# Altium PCB MotorDriver_Final_V1.0.PcbDoc
Units mm, origin at the board's own origin, x right, y up, seen from the top; angles counter-clockwise.
Board outline 59.56 x 69.98 mm, 2 copper layers (Top Layer, Bottom Layer); 76 components, 46 nets, 266 pads, 113 vias.
Unrouted connection lines stored in the file: 69.
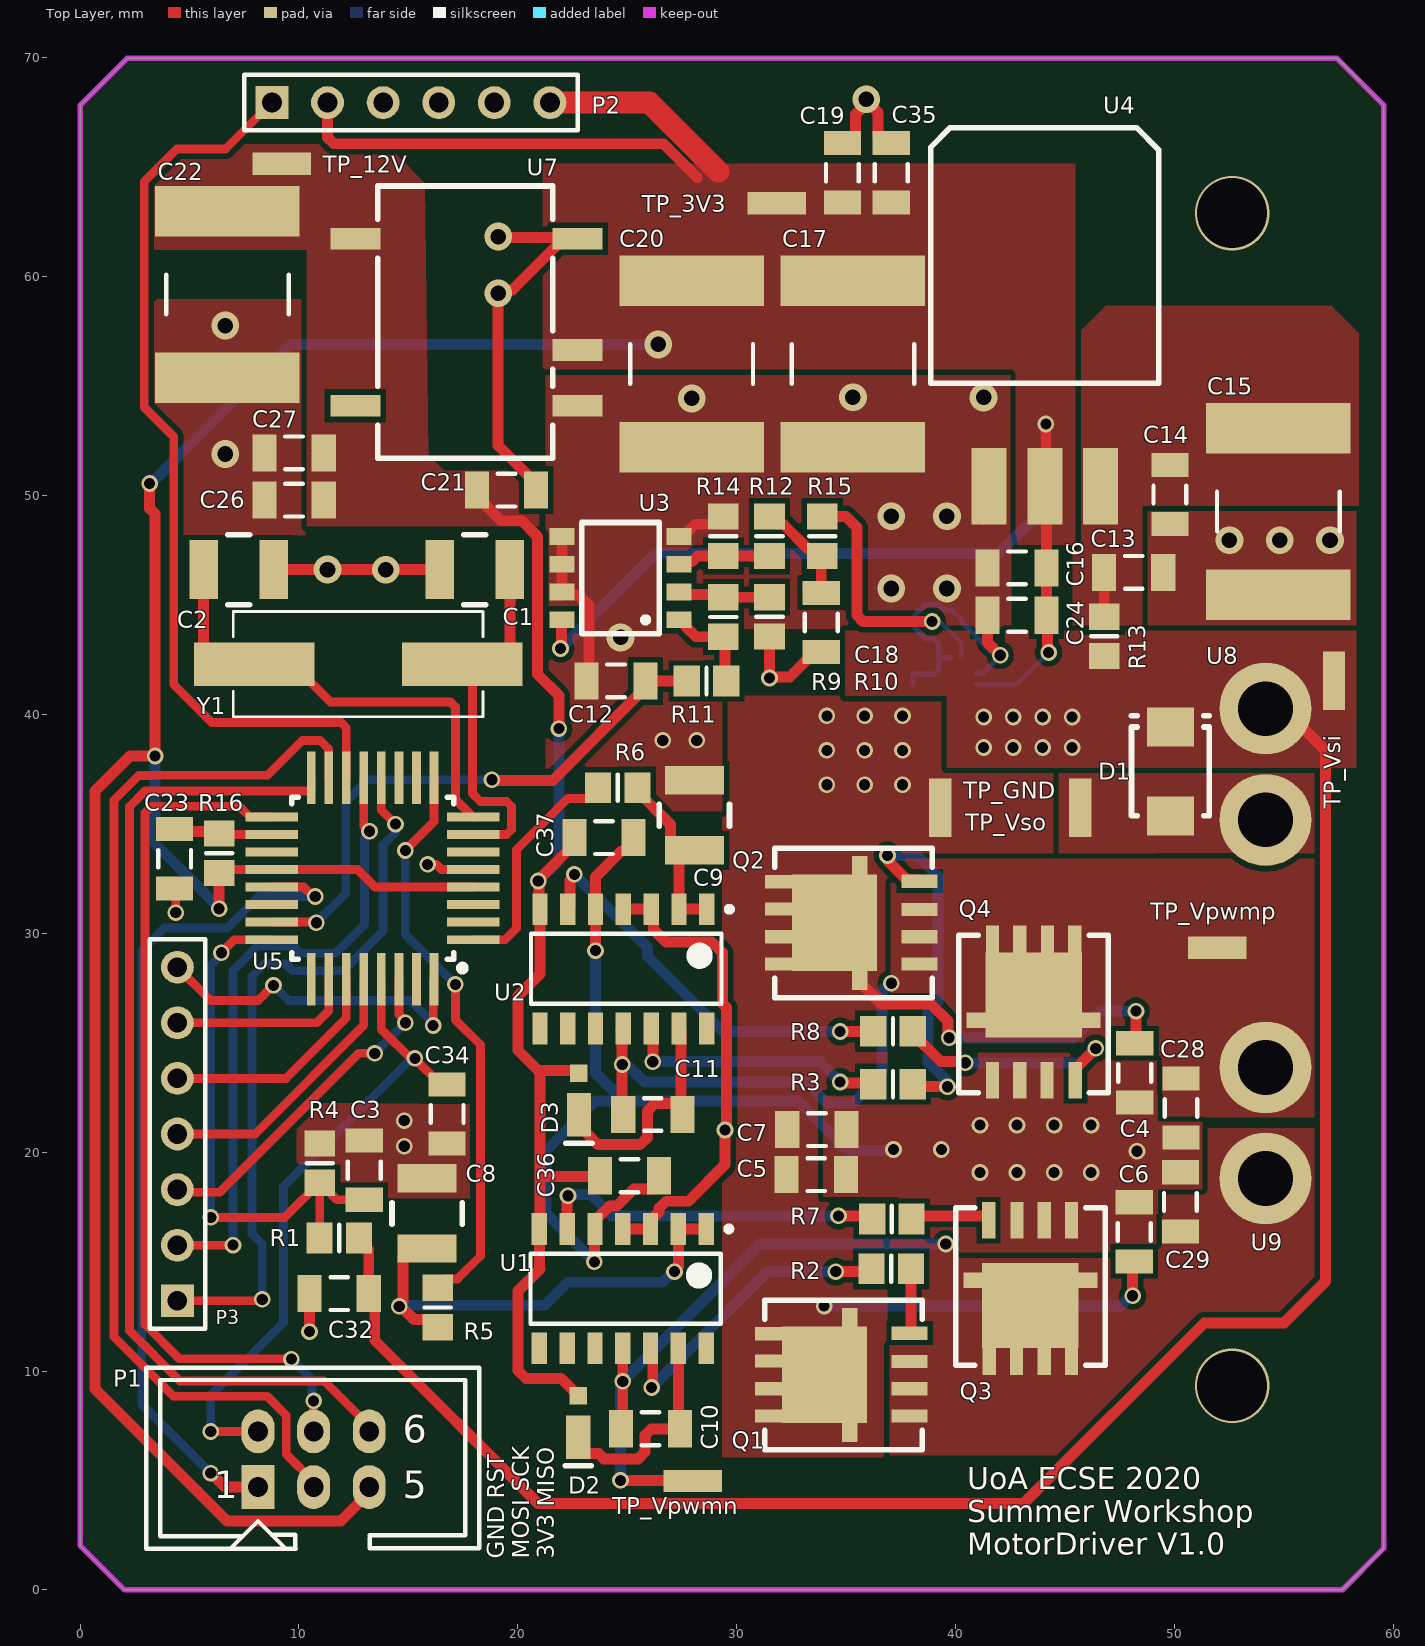
[diagram p0: Top Layer view]
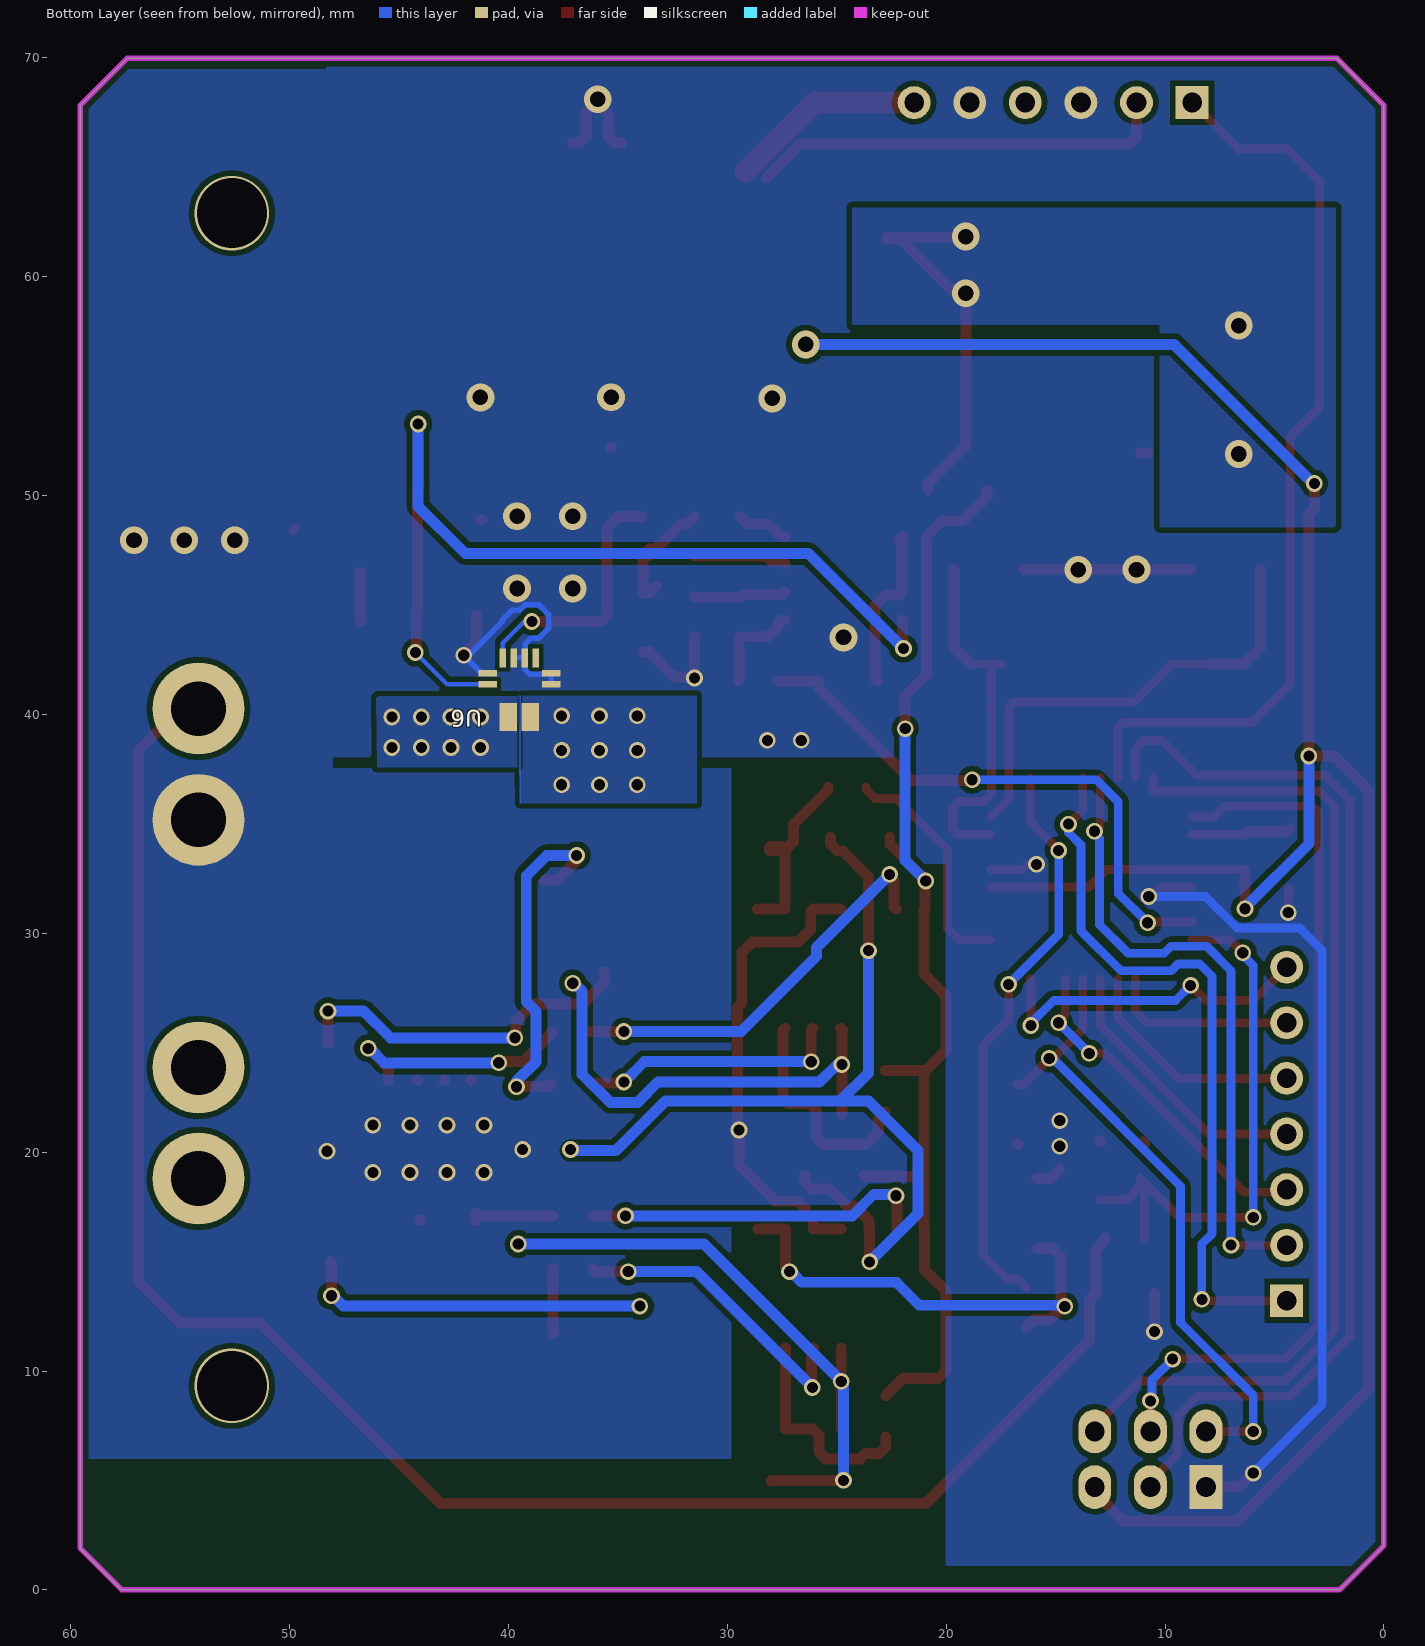
[diagram p1: Bottom Layer view, seen from below]
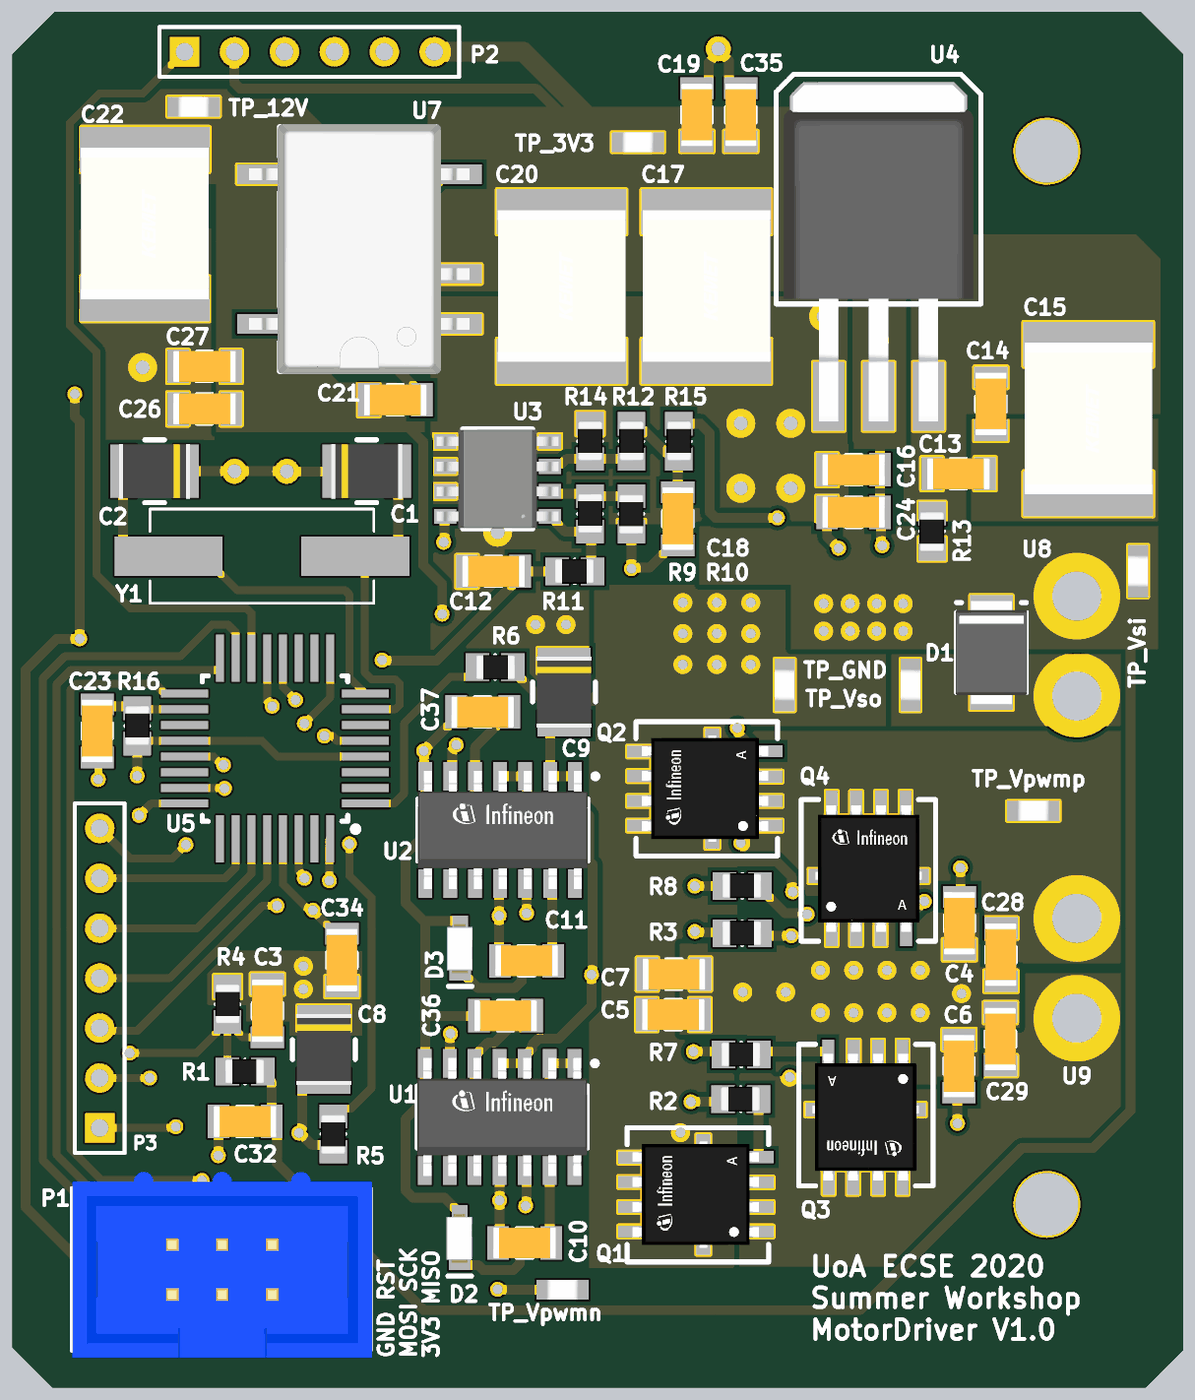
[diagram p2: 3D render of the assembled board from above, using the file's embedded part models]

## Layer stack, top to bottom
Top Solder: solder mask 0.0102, Solder Resist, Dk 3.5
Top Layer: signal copper 0.0356
Dielectric 1: dielectric 0.32, FR-4, Dk 4.8
Bottom Layer: signal copper 0.0356
Bottom Solder: solder mask 0.0102, Solder Resist, Dk 3.5

## Board outline
2.032,0 0,2.032 0,67.818 2.159,69.977 57.404,69.977 59.563,67.818 59.563,1.905 57.658,0

## Design rules (kind name [scope] priority, off if disabled: settings)
BoardOutlineClearance [All] p1: gap=0.254 ignorepadtopadclearanceinfootprint=FALSE except(0: Arc-SplitContinuation Track-SplitContinuation SMDPad-SplitContinuation THPad-SplitContinuation Via-SplitContinuation Fill-SplitContinuation Poly-SplitContinuation Region-SplitContinuation Text-SplitContinuation)
Clearance Clearance_1 [InComponent('U6')] p1: gap=0.19 ignorepadtopadclearanceinfootprint=TRUE
Clearance [All] p2: gap=0.254 ignorepadtopadclearanceinfootprint=TRUE
Height [All] p1: minheight=0 maxheight=100 prefheight=12.7
HoleSize [All] p1: absolutevalues=TRUE maxlimit=10 minlimit=0.5 maxpercent=80.000 minpercent=20.000
MinimumSolderMaskSliver [All] p1: minsoldermaskwidth=0.191
PolygonConnect [All] p1: connectstyle=Direct reliefconductorwidth=0.5 reliefentries=4 polygonreliefangle="90 Angle" airgapwidth=0.5
RoutingVias [All] p1: holewidth=0.711 width=1.27 viastyle="Through Hole" minholewidth=0.711 minwidth=1.27 maxholewidth=0.711 maxwidth=1.27
SilkToSilkClearance [All] p1: silktosilkclearance=0.1
SilkToSolderMaskClearance [IsPad] p1: minsilkscreentomaskgap=0.1 clearancetoexposedcopper=TRUE
SolderMaskExpansion [All] p1: expansion=0.102 istentingtop=FALSE
Width [All] p1: maxlimit=1 minlimit=0.2 preferedwidth=0.5
25 further rules are at their usual default settings.

## Components (designator, comment, footprint, x,y, rotation, side; value= is the part's Value field where it differs from the comment)
C1 "CER 18pF" C1210 18.034,46.609 r0 top value=?
C2 "CER 18pF" C1210 7.239,46.609 r180 top value=?
C3 "Cap CER" C1206 12.979,19.173 r270 top value=?
C4 "CER 100nF" C1206 48.184,23.622 r90 top value=100nF/100V
C5 "CER 100nF" C1206 33.655,21.031 r180 top value=100nF/100V
C6 "CER 100nF" C1206 48.158,16.358 r270 top value=100nF/100V
C7 "CER 100nF" C1206 33.63,18.974 r180 top value=100nF/100V
C8 "CER 6.8nF" C1210 15.85,17.196 r270 top value=?
C9 "CER 6.8nF" C1210 28.067,35.382 r270 top value=?
C10 "CER 220nF" C1206 26.06,7.359 r0 top value=100nF/100V
C11 "CER 220nF" C1206 26.162,21.717 r0 top value=100nF/100V
C12 "Cap CER" C1206 24.482,41.522 r0 top value=?
C13 "CER 6.8nF" C1206 48.133,46.482 r180 top value=?
C14 "CER 100nF" C1206 49.784,50.038 r90 top value=?
C15 "FILM 10uF" LDECE4150KA0N00 54.737,49.266 r90 top value=1.5uF/50V
C16 "Cap CER" C1206 42.799,46.685 r0 top value=100nF/100V
C17 "FILM 10uF" LDECE4150KA0N00 35.306,56.007 r90 top value=1.5uF/50V
C18 "Cap CER" C1206 33.858,44.196 r90 top value=?
C19 "CER 100nF" C1206 34.823,64.74 r270 top value=?
C20 "FILM 10uF" LDECE4150KA0N00 27.94,56.007 r90 top value=1.5uF/50V
C21 "CER 100nF" C1206 19.482,50.241 r180 top value=?
C22 "FILM 2.2uF" LDECE4150KA0N00 6.731,59.182 r90 top value=1.5uF/50V
C23 "Cap CER" C1206 4.318,33.401 r90 top value=?
C24 "CER 100nF" C1206 42.799,44.526 r0 top value=?
C26 "CER 100nF" C1206 9.779,49.784 r0 top value=100nF/100V
C27 "CER 100nF" C1206 9.779,51.943 r0 top value=100nF/100V
C28 "CER 100nF" C1206 50.292,22.022 r90 top value=?
C29 "CER 100nF" C1206 50.267,17.729 r270 top value=?
C32 "CER 100nF" C1206 11.836,13.538 r0 top value=?
C34 "CER 100nF" C1206 16.764,21.742 r90 top value=?
C35 "Cap CER" C1206 37.059,64.74 r90 top value=?
C36 "CER 100nF" C1206 25.095,18.923 r180 top value=100nF/100V
C37 "CER 100nF" C1206 23.927,34.366 r180 top value=100nF/100V
D1 "DO-214AA SMB" DO-214AA 49.809,37.389 r270 top
D2 "MSS1P6-M3/89A" "MicroSMP (DO-219AD)" 22.758,7.928 r90 top
D3 "MSS1P6-M3/89A" "MicroSMP (DO-219AD)" 22.784,22.66 r90 top
P1 "Header 7" HDR1X7 4.445,13.208 r90 top
P2 "Header 6" HDR1X6 8.763,67.945 r0 top
P3 "HDR3X2" HDR2X3_2P54 8.128,4.699 r0 top
Q1 "NMOS" BSC072N08NS5ATMA1_modified_v2 34.773,9.823 r90 top
Q2 "NMOS" BSC072N08NS5ATMA1_modified_v2 35.23,30.473 r90 top
Q3 "NMOS" BSC072N08NS5ATMA1_modified_v2 43.409,13.76 r180 top
Q4 "NMOS" BSC072N08NS5ATMA1_modified_v2 43.561,26.409 r0 top
R1 "RES 27k" R0805 11.836,16.078 r0 top value=?
R2 "RES 2.2" R0805 37.059,14.674 r0 top value=?
R3 "RES 2.2" R0805 37.135,23.107 r0 top value=?
R4 "RES 10k" R0805 10.947,19.496 r270 top value=?
R5 "RES 150k" R0805 16.332,12.903 r90 top value=?
R6 "RES 150k" R0805 24.562,36.652 r180 top value=?
R7 "RES 2.2" R0805 37.084,16.942 r0 top value=?
R8 "RES 2.2" R0805 37.135,25.52 r0 top value=?
R9 "Resistor 0805" R0805 29.388,44.443 r270 top value=?
R10 "Resistor 0805" R0805 31.496,44.45 r90 top value=?
R11 "Resistor 0805" R0805 28.615,41.522 r0 top value=?
R12 "Resistor 0805" R0805 31.496,48.133 r270 top value=?
R13 "RES 150k" R0805 46.787,43.561 r90 top value=?
R14 "Resistor 0805" R0805 29.388,48.133 r270 top value=?
R15 "Resistor 0805" R0805 33.909,48.133 r270 top value=?
R16 "Resistor 0805" R0805 6.35,33.655 r270 top value=?
TP_3V3 "TP_3V3" TP5015 31.826,63.348 r180 top
TP_12V "TP_12V" TP5015 9.22,65.151 r0 top
TP_GND "TP_GND" TP5015 45.695,35.738 r270 top
TP_Vpwmn "TP_Vsi" TP5015 27.991,4.978 r180 top
TP_Vpwmp "TP_Vi_amp" TP5015 51.943,29.337 r180 top
TP_Vsi "TP_Vsi" TP5015 57.277,41.529 r270 top
TP_Vso "TP_Vso" TP5015 39.294,35.738 r270 top
U1 "IRS21834SPBF" SOIC127P600X175-14N 24.79,13.767 r270 top
U2 "IRS21834SPBF" SOIC127P600X175-14N 24.816,28.372 r270 top
U3 "LT6221IS8#PBF" SOIC8_NARROW 24.689,46.221 r180 top
U4 "LD1086D2M" D2PAK-3L 44.069,59.309 r0 top
U5 "ATMega328PB" TQFP32 13.363,32.506 r180 top
U6 "ACS70331EESATR-005U3" ACS70331_12QFN 39.497,41.224 r90 bottom
U7 "ISE0312A" ISE0312A 17.907,57.912 r180 top
U8 "2 PIN HEADER 3MM" 3mm_holes 54.153,37.719 r270 top
U9 "2 PIN HEADER 3MM" 3mm_holes 54.153,21.329 r270 top
Y1 "ECS-80-18-5PX-TR" XTAL_ECS-80-18-5PX-TR 12.7,42.291 r180 top

## Footprints (in the part's own frame and the unit in brackets; to place one, negate y for a bottom-side part, rotate by r counter-clockwise, add the part's x,y. Pads: shape width x height; smd on the part's side, far side on the other; paste and mask are expansions set on the pad)
3mm_holes [mm]
  round 4.2 hole 2.5: 1(-2.54,0) 2(2.54,0)
ACS70331_12QFN [mm] "HIGH SENSITIVITY, 1 MHZ, GMR-BAS"
  rect 1.27x0.8 smd: 1(-1.35,0.5) 2(-1.35,-0.5)
  rect 0.3x0.85 smd: 5(0.15,-1.45) 6(0.65,-1.45) 11(0.65,1.45) 12(0.15,1.45)
  rect 0.85x0.3 smd: 7(1.35,-0.75) 8(1.35,-0.25) 9(1.35,0.25) 10(1.35,0.75)
  body extent -1.6,-1.5 1.4,1.5, height 0.75
BSC072N08NS5ATMA1_modified_v2 [mil]
  rect 23.94x65 smd: 1(-74,-123) 1(-25,-123) 1(24,-123) 4(75,-123) 8(-74,123) 8(-25,123) 8(25,123) 8(74,123)
  rect 65x27.87 smd: 8(-88,-15) 8(88,-15)
  rect 173.62x153.54 smd: 8(0,30.26)
  silkscreen extent -135,-146 134,138, body extent -106,-127 107,127, height 40
C1206 [mm] "Chip Capacitor, Body 3.2x1.6mm, IPC High Density"
  rect 1.1x1.7 smd: 1(-1.35,0) 2(1.35,0)
  silkscreen extent -0.4,-0.75 0.4,0.75, body extent -1.6,-0.8 1.6,0.8, height 1.5
C1210 [mm]
  rect 1.3x2.7 smd: 1(-1.6,0) 2(1.6,0)
  silkscreen extent -0.5,-1.6 0.5,1.6, body extent -1.8,-1.4 1.8,1.4, height 1.24
D2PAK-3L [mil]
  rect 63x137.8 smd: 1(100,-350) 2(0,-350) 3(-100,-350)
  silkscreen extent -205,-165 205,295, body extent -190,-400 190,279, height 200
DO-214AA [mil]
  rect 70x85 smd: 1(-80,0) 2(80,0)
  silkscreen extent -100,-70 80,70, body extent -104,-71 104,71, height 87
HDR1X6 [mm] "Connector; Header; 6 Position"
  rect 1.5x1.5 hole 0.9: 1(0,0)
  round 1.5 hole 0.9: 2(2.54,0) 3(5.08,0) 4(7.62,0) 5(10.16,0) 6(12.7,0)
  silkscreen extent -1.27,-1.27 13.97,1.27
HDR1X7 [mm] "Connector; Header; 7 Position"
  rect 1.5x1.5 hole 0.9: 1(0,0)
  round 1.5 hole 0.9: 2(2.54,0) 3(5.08,0) 4(7.62,0) 5(10.16,0) 6(12.7,0) 7(15.24,0)
  silkscreen extent -1.27,-1.27 16.51,1.27
HDR2X3_2P54 [mm] "IDC 3X2 Way 2.54 pitch"
  rect 1.5x2 hole 0.9: 1(0,0)
  oval 1.5x2 hole 0.9 paste+0: 2(0,2.54)
  oval 1.5x2 hole 0.9: 3(2.54,0) 4(2.54,2.54) 5(5.08,0) 6(5.08,2.54)
  silkscreen extent -5.1,-2.82 10.1,5.45, body extent -5.07,-3.17 10.17,6.28, height 9.1
ISE0312A [mil] "8-SMD model; 5 leads"
  rect 90x39 smd: 1(-190,150) 2(-190,50) 4(-190,-150) 5(210,-150) 8(210,150)
  silkscreen extent -145,-245 170,245, body extent -210,-250 230,250, height 285
LDECE4150KA0N00 [mm]
  rect 2.3x6.6 smd: 1(-3.8,0) 2(3.8,0)
  silkscreen extent -0.9,-2.8 0.9,2.8, body extent -3.82,-3.26 3.88,3.24, height 4.29
"MicroSMP (DO-219AD)" [mm]
  rect 0.8x0.8 smd: 1(0.95,0)
  rect 2x1.1 smd: 2(-0.95,0)
  silkscreen extent -2.25,-0.6 -2.25,0.6, body extent -1.58,-0.64 0.92,0.66, height 0.66
R0805 [mm]
  rect 1.2x1.4 smd: 1(-0.9,0) 2(0.9,0)
  silkscreen extent 0,-0.6 0,0.6, body extent -1.04,-0.63 0.99,0.64, height 0.6
SOIC8_NARROW [mil]
  rect 45x30 smd: 1(-105,75) 2(-105,25) 3(-105,-25) 4(-105,-75) 5(105,-75) 6(105,-25) 7(105,25) 8(105,75)
  silkscreen extent -70,-100 70,100, body extent -122,-98 122,99, height 69
SOIC127P600X175-14N [mm] "SOIC, 14-Leads, Body 8.65x3.90mm, Pitch 1.27mm, IPC Medium Density"
  rect 1.45x0.7 smd: 1(-2.725,3.81) 2(-2.725,2.54) 3(-2.725,1.27) 4(-2.725,0) 5(-2.725,-1.27) 6(-2.725,-2.54) 7(-2.725,-3.81) 8(2.725,-3.81) 9(2.725,-2.54) 10(2.725,-1.27) 11(2.725,0) 12(2.725,1.27) 13(2.725,2.54) 14(2.725,3.81)
  silkscreen extent -2.85,-4.22 1.6,4.97, body extent -3,-4.19 3,4.46, height 1.56
TP5015 [mil]
  rect 105x40 smd: 1(0,0)
  body extent -51,-20 51,19, height 59
TQFP32 [mm]
  rect 2.4x0.4 smd: 1(-4.6,2.8) 2(-4.6,2) 3(-4.6,1.2) 4(-4.6,0.4) 5(-4.6,-0.4) 6(-4.6,-1.2) 7(-4.6,-2) 8(-4.6,-2.8) 17(4.6,-2.8) 18(4.6,-2) 19(4.6,-1.2) 20(4.6,-0.4) 21(4.6,0.4) 22(4.6,1.2) 23(4.6,2) 24(4.6,2.8)
  rect 0.4x2.4 smd: 9(-2.8,-4.6) 10(-2,-4.6) 11(-1.2,-4.6) 12(-0.4,-4.6) 13(0.4,-4.6) 14(1.2,-4.6) 15(2,-4.6) 16(2.8,-4.6) 25(2.8,4.6) 26(2,4.6) 27(1.2,4.6) 28(0.4,4.6) 29(-0.4,4.6) 30(-1.2,4.6) 31(-2,4.6) 32(-2.8,4.6)
  silkscreen extent -4.24,-3.7 3.7,4.24, body extent -3.5,-3.5 3.5,3.5, height 1.3
XTAL_ECS-80-18-5PX-TR [mm]
  rect 5.5x2 smd: 1(-4.75,0) 2(4.75,0)
  silkscreen extent -5.7,-2.4 5.7,2.4, body extent -6.6,-2.41 6.6,2.41, height 4.32

## Part data
C1 C2 C3 C8 C9 C12 C13 C14 C18 C19 C21 C23 C24 C28 C29 C32 C34 C35: library part CCAP0805, "CCAP0805", MPN=?, Part Description=?, Type="Surface Mount"
C4 C5 C6 C7 C10 C11 C16 C26 C27 C36 C37: library part "Cap CER Decoup C3216C0G2A104J160AC", "CAP CER 0.1UF 100V C0G 1206", Manufacturer="TDK Corporation", MPN=C3216C0G2A104J160AC, Supplier Part Number 1=1795799, Part Description="CAP CER 0.1UF 100V C0G 1206", Supplier 1=RSComponents, Supplier 2=Element14, Supplier 3=Digi-Key, Supplier 4=Mouser, Supplier Part Number 2=2906828, Supplier Part Number 3=445-172677-1-ND, Supplier Part Number 4=810-C3216C0G2A104J6C, Type="Surface mount"
C15 C17 C20 C22: library part "Cap Film SMD LDECE4150KA0N00", "CAP FILM 1.5UF 10% 50VDC 2824", Manufacturer=KEMET, MPN=LDECE4150KA0N00, Supplier Part Number 1=2495712, Part Description="CAP FILM 1.5UF 10% 50VDC 2824", Supplier 1=Element14, Supplier 2=RSComponents, Supplier 3=Digi-Key, Supplier 4=Mouser, Supplier Part Number 2=1650342, Supplier Part Number 3=399-12858-1-ND, Supplier Part Number 4=80-LDECE4150KA0N00, Type="Surface mount"
D1: library part SMBJ5351B-TP, "14V zener diode"
D2 D3: library part "Diode MSS1P6-M3/89A", "DIODE SCHOTTKY 60V 1A MICROSMP", Manufacturer="Vishay Semiconductor Diodes Division", Supplier Part Number 1=7103070P, MPN=MSS1P6-M3/89A, Part Description="DIODE SCHOTTKY 60V 1A MICROSMP", Supplier 1=RSComponents, Supplier 2=Element14, Supplier Part Number 2=2335157, Type="Surface mount"
P1: "Header, 7-Pin", LatestRevisionDate=17-Jul-2002, LatestRevisionNote="Re-released for DXP Platform.", Publisher="Altium Limited"
P2: "Header, 6-Pin", LatestRevisionDate=17-Jul-2002, LatestRevisionNote="Re-released for DXP Platform.", Publisher="Altium Limited"
P3: "Header, 3-Pin, Dual row"
Q1 Q2 Q3 Q4: library part "NMOS OptiMOS BSC072N08NS5ATMA1", "MOSFET N-CH 80V 74A 8TDSON", Manufacturer="Infineon Technologies", MPN=BSC072N08NS5ATMA1, Supplier Part Number 1=2725812, Part Description="MOSFET N-CH 80V 74A 8TDSON", Supplier 1=Element14, Supplier 2=Digi-Key, Supplier 3=Mouser, Supplier Part Number 2=BSC072N08NS5ATMA1CT-ND, Supplier Part Number 3=726-BSC072N08NS5ATMA, Type="Surface mount"
R1 R2 R3 R4 R5 R6 R7 R8 R9 R10 R11 R12 R13 R14 R15 R16: library part RES0805, "RES0805", MPN=?, Part Description=?, Type="Surface Mount"
TP_3V3 TP_12V TP_GND TP_Vpwmn TP_Vpwmp TP_Vsi TP_Vso: library part TP_5015, "SM Test Point 5015"
U1 U2: "IC GATE DRVR HALF-BRIDGE 14SOIC"
U4: library part LD1086D2M33TR, "3.3V linear voltage regulator"
U5: "IC MCU 8BIT 32KB FLASH 32TQFP", Supplier Part Number 1=ATMEGA328PB-AU-ND, Supplier 1=Digi-Key, Supplier 2=Digikey, Supplier Part Number 2=ATMEGA328PB-AU-ND
U6: library part ACS70331_QFN, "HIGH SENSITIVITY, 1 MHZ, GMR-BAS"
U7: library part ISE0312A_8-SMD_5L, "3V-12V DC DC converter"
U8 U9: library part HEADER_2PIN, "3MM HOLES"
Y1: "8MHz Â±30ppm Crystal 18pF 60 Ohms HC-49/US", Package="HC49/US ECS International", Digi-Key_Part_Number=XC1271CT-ND, Digi-Key_Purchase_URL=https://www.digikey.com/product-detail/en/ecs-inc/ECS-80-18-5PX-TR/XC1271CT-ND/827735?utm_source=snapeda&utm_medium=aggregator&utm_campaign=symbol, MF="ECS Inc.", MP=ECS-80-18-5PX-TR, SnapEDA_Link=https://www.snapeda.com/parts/ECS-80-18-5PX-TR/ECS%20Inc./view-part/470513/?ref=snap

## Via types
v1: diameter 0.762, hole 0.508, Top Layer to Bottom Layer, 92 vias
v2: diameter 1.27, hole 0.711, Top Layer to Bottom Layer, 19 vias
v3: diameter 3.4, hole 3.2, Top Layer to Bottom Layer, 2 vias

## Nets (pads, with @x,y where several pads share a name; then routed paths per layer and width w, separated by ;. In a path a pad name is that pad's centre, name@x,y a point inside that pad or via, vN(x,y) a via of type N, cw(c..) or ccw(c..) an arc to the next point about the centre after c; other vN are vias at no path point)
3V3: C16.2 C17.2 C19.2 C20.2 C24.2 C35.1 P2.2 P2.6 P3.5 R16.2 TP_3V3.1 U3.8 U4.2 U5.4 U5.20 U6.12 U7.2 | length 179.7
  Top Layer w0.4: R16.2 6.35,32.906 U5.20 12.687,32.906 13.487,32.106 U5.4
  Top Layer w0.5: v1(3.179,50.542) 3.179,49.411 3.429,49.161 v1(3.429,38.092) 3.429,37.971 3.308,38.092 2.278,38.092 0.677,36.491 0.677,9.182 6.71,3.149 11.908,3.149 13.208,4.449 P3.5 ; v1(6.35,31.115) R16.2 ; P2.2 11.303,66.358 11.596,66.065 26.645,66.065 28.194,64.516 ; v1(21.946,43.002) 21.984,43.04 21.984,44.278 U3.8 ; v1(44.12,53.264) 44.12,50.47 U4.2 44.149,50.339 C16.2 44.149,44.831 44.198,44.782 44.198,42.873 v1(44.247,42.824)
  Top Layer w1: P2.6 26.01,67.945 29.159,64.795
  Bottom Layer w0.2: U6.12 42.797,41.374 v1(44.247,42.824)
  Bottom Layer w0.5: v1(3.179,50.542) 3.232,50.542 9.59,56.9 v2@26.412,56.9 ; v1(3.429,38.092) 3.429,34.088 6.35,31.167 v1(6.35,31.115) ; v1(21.946,43.002) 26.289,47.346 41.968,47.346 44.12,49.497 v1(44.12,53.264)
  other v2: 26.416,56.896
12V: C21.2 C22.2 C26.2 C27.2 C36.2 C37.2 D2.1 D3.1 TP_12V.1 U1.7 U2.7 U7.5 | length 54.8
  Top Layer w0.5: C27.2@10.795,51.943 C27.2 ; C21.2 18.132,49.941 19.232,48.841 20.18,48.841 20.9,48.121 20.9,41.83 21.869,40.861 v1(21.869,39.345) ; 20.98,14.65 U1.7 ; 21.006,14.65 20.006,13.65 20.006,10.023 20.361,9.667 21.969,9.667 D2.1 ; U1.7@21.006,16.518 21.006,23.653 20.922,23.737 ; 21.006,18.894 23.716,18.894 C36.2 ; C37.2 22.577,34.066 20.968,32.457 20.968,31.135 U2.7 21.006,28.138 20.006,27.138 20.006,24.653 20.922,23.737 ; D3.1@22.784,23.737 20.922,23.737
  Bottom Layer w0.5: v1(20.93,32.385) 21.869,33.325 v1(21.869,39.345)
CTS_0: P1.2 U5.13 | length 29.1
  Top Layer w0.4: P1.2 v1(6.985,15.748) ; U5.13 12.963,34.916 v1(13.22,34.659)
  Bottom Layer w0.4: v1(6.985,15.748) 6.985,28.29 8.094,29.399 9.731,29.399 10.047,29.083 11.684,29.083 12.992,30.391 12.992,34.333 13.22,34.561 v1(13.22,34.659)
D1H: R2.1 U1.12 | length 14.2
  Top Layer w0.5: U1.12 26.16,10.942 26.16,9.295 v1(26.111,9.246) ; v1(34.523,14.539) 36.023,14.539 R2.1
  Bottom Layer w0.5: v1(26.111,9.246) 31.405,14.539 v1(34.523,14.539)
D1L: R7.1 U1.6 | length 16
  Top Layer w0.5: U1.6 22.25,18.009 v1(22.288,18.009) ; v1@34.595,17.037 v1(34.646,17.087) R7.1@36.159,17.087
  Bottom Layer w0.5: v1(22.288,18.009) 22.288,18.072 23.304,18.072 24.289,17.087 v1(34.646,17.087)
D2H: R3.1 U2.12 | length 12
  Top Layer w0.5: U2.12 26.162,25.571 v1(26.162,24.13) ; v1(34.722,23.2) 34.768,23.154 36.188,23.154 R3.1
  Bottom Layer w0.5: v1(26.162,24.13) 33.792,24.13 v1(34.722,23.2)
D2L: R8.1 U2.6 | length 18.2
  Top Layer w0.5: U2.6 22.376,31.197 v1@22.376,32.414 ; v1@22.579,32.692 v1(22.581,32.69) ; v1(34.722,25.505) 34.729,25.513 36.227,25.513 R8.1
  Bottom Layer w0.5: v1(22.581,32.69) 25.917,29.353 25.917,28.947 29.359,25.505 v1(34.722,25.505)
DGND: C21.1 C22.1 C26.1 C27.1 U7.4 | length 18
  Top Layer w0.5: v2(19.101,61.824) 19.152,61.773 22.682,61.773 U7.4 22.085,61.722 19.743,59.38 19.248,59.38 v2(19.101,59.233) 19.101,52.272 20.832,50.541 C21.1
  other v2: 6.629,51.892 6.629,57.76
DIR_SIG: P1.4 U5.28 | length 12.7
  Top Layer w0.4: P1.4 7.996,20.828 12.963,25.795 U5.28
GND: C1.1 C2.1 C3.1 C4.1 C5.1 C6.1 C7.1 C8.1 C9.1 C12.1 C13.1 C14.1 C15.1 C16.1 C17.1 C18.1 C19.1 C20.1 C23.1 C24.1 C28.1 C29.1 C32.1 C34.1 C35.2 C36.1 C37.1 D1.2 P2.3 P2.5 P3.1 Q3.1 Q4.1 R4.1 R10.1 R14.1 TP_GND.1 U1.3 U1.4 U1.5 U2.3 U2.4 U2.5 U3.4 U3.5 U3.6 U3.7 U4.3 U5.5 U5.21 U6.5 U6.6 U6.8 U6.9 U6.11 U7.1 U8.2 | length 152.3
  Top Layer w0.4: C23.1 4.369,32 v1(4.369,30.937) ; U5.21 10.214,32.106 10.646,31.674 v1(10.744,31.674) ; v1@15.761,33.147 16.273,33.147 16.514,32.906 16.846,32.906 U5.5 ; U3.5 U3.5@22.203,47.945
  Top Layer w0.5: v1(5.969,5.334) 5.993,5.334 6.628,4.699 P3.1 ; C2.1 v2(11.303,46.609) 13.966,46.609 v2(13.966,46.605) 16.434,46.605 C1.1 ; v1@10.471,11.792 v1(10.479,11.8) 10.479,13.531 C32.1 ; R4.1 R4.1@11.011,20.46 ; C3.1@12.916,20.46 C3.1 C3.1@13.005,20.498 ; C8.1@14.834,19.196 15.234,18.796 C8.1 ; C34.1@16.72,20.349 C34.1 ; U3.5 U3.6 U3.7 22.153,45.455 22.755,45.455 23.243,44.967 23.243,41.634 C12.1 ; v1(23.495,14.986) 23.508,14.999 23.508,16.48 U1.5 23.52,16.867 24.197,17.544 24.514,17.544 25.294,18.323 26.145,18.323 26.445,18.623 C36.1 ; v1(23.546,29.203) U2.5 23.546,32.572 24.74,33.766 24.977,33.766 25.277,34.066 C37.1 ; U1.4 U1.3 26.06,16.867 26.451,17.258 26.451,17.437 26.769,17.755 27.788,17.755 29.464,19.431 v1(29.464,21.011) 29.526,21.073 29.526,26.6 29.337,26.789 29.337,29.108 28.854,29.591 26.772,29.591 26.186,30.177 26.186,30.997 U2.3 U2.4 ; U3.4 27.546,48.126 28.103,48.683 29.038,48.683 R14.1 ; R10.1@31.531,43.516 R10.1 v1(31.496,41.656) 31.546,41.706 32.418,41.706 33.558,42.846 C18.1 ; C19.1@34.823,66.095 35.123,66.095 35.423,66.395 35.423,67.397 35.916,67.889 v2(35.916,68.097) ; C17.1@35.306,52.197 C17.1 ; v2@35.941,68.072 35.941,68.011 36.459,67.493 36.459,66.395 36.759,66.095 C35.2@37.059,66.095 ; U4.3@41.195,48.895 U4.3@41.275,48.895 ; C24.1 41.449,43.285 v1(42.037,42.697) ; Q4.1@41.681,23.285 Q4.1@41.694,23.272 ; Q4.1@42.926,23.285 Q4.1@42.951,23.26 ; Q3.1@44.044,16.884 Q3.1@44.056,16.897 ; Q4.1@44.145,23.26 Q4.1@44.171,23.285 ; C14.1@49.784,48.434 C14.1@49.786,48.436
  Bottom Layer w0.254: U6.5 U6.6 38.07,41.851 38.446,41.851 38.465,41.832 39.029,41.832 39.224,42.027 U6.8@39.224,42.551 ; U6.9 U6.8 U6.8@39.224,42.551 ; U6.11 41.222,41.874 42.037,42.689 v1(42.037,42.697) 41.806,42.697 40.284,44.219 40.284,44.308 39.838,44.755 39.488,44.755 39.24,45.003 38.609,45.003 38.162,44.556 38.162,43.925 38.609,43.479 38.959,43.479 39.207,43.231 39.224,43.231 U6.8@39.224,42.551
  Bottom Layer w0.4: v1(5.969,5.334) 2.819,8.484 2.819,29.21 3.843,30.234 6.715,30.234 8.155,31.674 v1(10.744,31.674)
  Bottom Layer w0.5: v1(23.495,14.986) 21.294,17.187 21.294,20.071 23.55,22.327 24.841,22.327 ; v1(23.546,29.203) 23.546,23.622 24.841,22.327 ; v1@37.16,20.066 35.077,20.066 32.817,22.327 24.841,22.327
  other v1: 41.109,19.068 42.803,19.068 44.496,19.068 46.189,19.068 48.285,20.041 37.16,20.117 39.345,20.117 14.808,20.269 41.109,21.23 42.803,21.23 44.496,21.23 46.189,21.23 14.808,21.438 15.875,33.147 26.619,38.811 28.169,38.811
  other v2: 24.689,43.51 37.059,45.745 39.599,45.745 52.502,47.955 54.8,47.955 57.099,47.955 37.059,49.047 39.599,49.047 27.94,54.432 35.306,54.483 41.275,54.479
HIN1: C8.2 R5.1 U1.1 U1.2 | length 22.2
  Top Layer w0.5: C8.2 15.15,15.596 14.75,15.196 14.75,13.195 14.58,13.025 v1(14.58,12.954) 14.65,12.954 15.251,12.353 15.982,12.353 R5.1 ; v1(27.153,14.538) 27.153,14.609 27.33,14.786 U1.2 U1.1
  Bottom Layer w0.5: v1@14.58,13.005 21.227,13.005 22.277,14.055 26.599,14.055 27.082,14.538 v1(27.153,14.538)
HIN2: C9.2 R6.1 U2.1 U2.2 | length 9.3
  Top Layer w0.5: R6.1@25.386,36.652 25.386,36.552 26.967,34.971 26.967,34.182 C9.2@27.367,33.782 ; U2.1 U2.2 27.356,33.771 C9.2@27.367,33.782 ; C9.2@27.367,33.782 27.552,33.967 28.009,33.967 28.067,33.909 C9.2 27.552,33.782 C9.2@27.367,33.782
MISO: P3.6 U5.16 | length 46.2
  Top Layer w0.4: U5.16 10.563,36.501 2.971,36.501 2.261,35.791 2.261,11.84 4.559,9.541 11.156,9.541 13.208,7.489 P3.6
MOSI: P3.3 U5.15 | length 50.1
  Top Layer w0.4: P3.3 10.668,4.949 9.418,6.199 9.418,7.967 8.543,8.841 4.27,8.841 1.549,11.562 1.549,36.069 2.681,37.201 3.292,37.201 3.302,37.211 8.561,37.211 10.156,38.806 10.97,38.806 11.363,38.413 U5.15
NetC23_2: C23.2 R16.1 U5.18 | length 4.5
  Top Layer w0.4: R16.1@6.35,34.506 U5.18
  Top Layer w0.5: C23.2 4.416,34.653 6.203,34.653 R16.1@6.35,34.506
NetQ1_4: Q1.4 R2.2 | length 3.1
  Top Layer w0.5: Q1.4 37.905,11.728 Q1.4@37.959,11.782 ; Q1.4@37.959,11.68 R2.2
NetQ2_4: Q2.4 R3.2 | length 16.6
  Top Layer w0.5: v1(36.881,33.553) 36.931,33.503 36.931,33.28 37.778,32.432 38.3,32.432 Q2.4 ; R3.2 38.155,22.987 v1(39.624,22.987)
  Bottom Layer w0.5: v1(36.881,33.553) 38.246,33.553 39.182,32.617 39.182,26.871 38.744,26.433 38.744,24.121 39.624,23.241 v1(39.624,22.987)
NetQ3_4: Q3.4 R7.2 | length 3.8
  Top Layer w0.5: R7.2@37.959,17.087 Q3.4@41.45,17.087 ; Q3.4@41.45,17.189 41.504,17.135 Q3.4
NetQ4_4: Q4.4 R8.2 | length 11.1
  Top Layer w0.5: R8.2 38.035,25.42 39.326,24.129 40.387,24.129 v1(40.437,24.079) ; Q4.4 45.466,23.807 v1(46.399,24.74)
  Bottom Layer w0.5: v1(40.437,24.079) 45.668,24.079 46.328,24.74 v1(46.399,24.74)
NetR9_1: R9.1 R10.2 U3.2 | length 4.2
  Top Layer w0.5: U3.2 27.477,45.465 29.266,45.465 R9.1 29.391,45.347 31.493,45.347 R10.2
NetR9_2: R9.2 R11.2 U3.1 | length 4.4
  Top Layer w0.5: U3.1 27.546,44.316 27.677,44.185 27.677,43.995 28.129,43.543 R9.2 ; R9.2@29.451,43.48 29.451,41.586 R11.2
NetR12_2: R12.2 R14.2 U3.3 | length 4.3
  Top Layer w0.5: U3.3 27.487,46.987 27.947,46.987 28.193,47.233 R14.2 R12.2
NetR15_1: R15.1 U6.10 | length 11.8
  Top Layer w0.5: R15.1 34.99,49.033 35.484,48.539 35.484,44.526 35.769,44.241 v1(38.924,44.241)
  Bottom Layer w0.2: v1(38.924,44.241) 39.275,44.241 40.247,43.268 U6.10
PWM_L: R5.2 U5.9 | length 26.4
  Top Layer w0.4: v1(14.859,33.782) 16.163,35.086 U5.9 ; R5.2 16.732,14.203 17.237,14.203 18.288,15.255 18.288,24.907 17.145,26.05 v1(17.145,27.661)
  Bottom Layer w0.4: v1(14.859,33.782) 14.859,29.947 v1(17.145,27.661)
PWM_R: R6.2 U5.1 | length 10.7
  Top Layer w0.4: U5.1 19.412,29.706 19.939,30.233 19.939,33.806 22.285,36.152 23.262,36.152 23.662,36.552 R6.2
RST: C34.2 P3.2 U5.29 | length 29.1
  Top Layer w0.4: v1@6.096,7.239 P3.2 P3.2@8.128,7.156 ; U5.29 13.763,25.607 v1@15.113,24.257 ; v1(15.291,24.282) 15.291,24.266 16.464,23.092 C34.2
  Bottom Layer w0.4: v1(5.969,7.239) 5.969,8.89 9.296,12.217 9.296,18.44 v1@15.113,24.257
RTS_0: P1.1 U5.12 | length 33.5
  Top Layer w0.4: P1.1 8.255,13.208 v1(8.319,13.271) ; U5.12 13.763,35.989 13.763,35.628 v1(14.409,34.983)
  Bottom Layer w0.4: v1(8.319,13.271) 8.319,15.802 7.85,16.27 7.85,28.024 8.425,28.599 9.4,28.599 9.715,28.283 12.015,28.283 13.843,30.111 13.843,34.036 14.409,34.602 v1(14.409,34.983)
RX_0: P1.3 U5.30 | length 15.7
  Top Layer w0.4: P1.3@4.445,18.161 6.375,18.161 12.725,24.511 v1(13.462,24.511) ; U5.30 14.563,26.302 14.859,26.006 v1(14.859,25.908)
  Bottom Layer w0.4: v1(13.462,24.511) v1(14.859,25.908)
S1H: C10.1 C29.2 Q1.1 Q3.8 TP_Vpwmn.1 U1.11 U9.2 | length 29
  Top Layer w0.5: v1(24.689,5.004) 24.701,4.991 27.978,4.991 TP_Vpwmn.1 ; C10.1@24.79,7.359 v1(24.79,9.525) U1.11
  Bottom Layer w0.5: v1(24.689,5.004) 24.689,9.423 v1@24.828,9.563 ; v1(24.79,9.525) v1@24.828,9.563 ; v1(39.548,15.799) 31.064,15.799 v1@24.828,9.563
S2H: C11.1 C28.2 Q2.1 Q4.8 TP_Vpwmp.1 U2.11 U9.1 | length 21.5
  Top Layer w0.5: C11.1@24.765,21.717 v1(24.765,24.003) 24.765,25.498 24.716,25.547 U2.11
  Bottom Layer w0.5: v1(24.765,24.003) 24.972,24.003 25.776,23.199 33.172,23.199 34.102,22.269 35.342,22.269 36.625,23.552 36.625,27.354 36.63,27.354 36.988,27.711 v1(37.059,27.711)
SCK: P3.4 U5.17 | length 40.6
  Top Layer w0.4: U5.17 7.763,35.306 7.268,35.801 3.261,35.801 2.963,35.503 2.963,12.128 4.531,10.559 9.634,10.559 v1(9.652,10.541) ; P3.4 v1(10.668,8.636)
  Bottom Layer w0.4: v1(9.652,10.541) 10.599,9.594 10.599,8.705 v1(10.668,8.636)
Spd_Sig0: P1.6 U5.26 | length 8.6
  Top Layer w0.4: P1.6 10.814,25.908 11.363,26.457 U5.26
Spd_Sig1: P1.5 U5.27 | length 10.6
  Top Layer w0.4: P1.5 9.405,23.368 12.163,26.126 U5.27
ST_INT: P1.7 U5.32 | length 15.6
  Top Layer w0.4: P1.7 5.969,26.924 8.138,26.924 v1(8.831,27.618) ; v1(16.129,25.781) 16.129,27.872 U5.32
  Bottom Layer w0.4: v1(8.831,27.618) 9.525,26.924 15.089,26.924 16.129,25.884 v1(16.129,25.781)
TX_0: U5.31
VB1: C10.2 D2.2 U1.13 | length 9.9
  Top Layer w0.5: D2.2 22.758,6.528 23.058,6.228 23.693,6.228 23.941,5.98 25.48,5.98 25.81,6.311 25.81,7.066 26.103,7.359 27.33,7.359 U1.13
VB2: C11.2 D3.2 U2.13 | length 10.5
  Top Layer w0.5: D3.2@22.784,21.837 23.084,21.537 23.084,20.918 23.664,20.338 25.581,20.338 25.916,20.673 25.916,21.883 26.252,22.218 27.226,22.218 27.456,22.448 27.456,25.547 U2.13
Vi: C18.2 R12.1 R15.2 | length 5.6
  Top Layer w0.5: R12.1 31.846,48.683 32.124,48.683 33.258,47.549 33.543,47.549 33.858,47.233 C18.2 33.558,45.546 C18.2@33.258,45.846 ; R15.2@33.535,47.302 R15.2@33.604,47.233
Vi_amp: C12.2 R11.1 U5.23 | length 26.2
  Top Layer w0.4: U5.23 10.769,30.506 v1(10.795,30.48)
  Top Layer w0.5: v1(18.811,37.008) 18.836,36.982 21.592,36.982 25.832,41.222 C12.2 R11.1
  Bottom Layer w0.4: v1(10.795,30.48) 12.132,31.817 12.132,36.008 13.132,37.008 v1(18.811,37.008)
Vin: C32.2 D1.1 R1.2 R13.1 TP_Vsi.1 U6.1 U8.1 | length 83.8
  Top Layer w0.4: R1.2 R1.2@12.979,15.835 ; U8.1 U8.1@54.991,40.259
  Top Layer w0.5: R1.2 12.736,15.978 13.186,15.528 C32.2 13.46,13.265 13.46,11.405 20.923,3.941 43.104,3.941 51.355,12.192 54.991,12.192 56.896,14.097 56.896,38.354 U8.1@54.991,40.259
  other v1: 41.275,38.481 42.623,38.481 43.971,38.481 45.319,38.481 41.275,39.878 42.623,39.878 43.971,39.878 45.319,39.878
VinFILT: C13.2 C14.2 C15.2 R13.2 U4.1 | length 2.1
  Top Layer w0.5: R13.2@46.696,44.247 R13.2@46.736,44.207 ; C13.2 46.785,46.48 46.785,44.463 R13.2
Vs: C3.2 R1.1 R4.2 U5.24 | length 25.7
  Top Layer w0.4: v1(5.969,17.018) 9.351,17.018 R4.2@11.129,18.796 ; v1(6.452,29.108) 7.049,29.706 U5.24 ; R4.2@10.925,18.618 R4.2 ; R1.1 10.947,16.089 R4.2 ; C3.2 11.72,17.823 11.447,18.096 11.447,18.196 11.047,18.596 R4.2
  Bottom Layer w0.4: v1(5.969,17.018) 5.969,28.528 6.452,29.01 v1(6.452,29.108)
Vso: C4.2 C5.2 C6.2 C7.2 Q1.8 Q2.8 TP_Vso.1 U6.2 | length 32.4
  Top Layer w0.5: Q2.8@35.611,28.238 35.611,27.767 36.607,26.77 38.863,26.77 39.65,25.983 39.65,25.272 v1(39.7,25.222) ; v1(48.082,13.437) 48.082,14.957 C6.2@48.133,15.008 ; C4.2@48.235,24.972 v1(48.235,26.441)
  Bottom Layer w0.5: v1@33.985,12.954 33.996,12.964 47.539,12.964 48.011,13.437 v1(48.082,13.437) ; v1(39.7,25.222) 45.39,25.222 46.609,26.441 v1(48.235,26.441)
  other v1: 33.99,12.964 34.112,36.779 35.839,36.779 37.567,36.779 34.112,38.354 35.839,38.354 37.567,38.354 34.112,39.929 35.839,39.929 37.567,39.929
Wout: P2.1 U5.14 | length 41.8
  Top Layer w0.4: P2.1 6.646,65.828 4.419,65.828 2.931,64.339 2.931,54.025 4.283,52.673 4.283,41.359 6.018,39.624 11.929,39.624 12.163,39.39 U5.14
X1: C1.2 U5.7 Y1.1 | length 16.9
  Top Layer w0.4: Y1.1 Y1.1@17.93,42.291 ; U5.7 19.08,34.506 19.476,34.506 19.71,34.74 19.71,35.783 19.476,36.017 18.288,36.017 17.93,36.375 Y1.1@17.93,42.291 ; Y1.1@18.884,42.291 Y1.1@17.93,42.291
  Top Layer w0.5: Y1.1@18.884,42.291 19.634,43.041 C1.2
X2: C2.2 U5.8 Y1.2 | length 21.6
  Top Layer w0.4: Y1.2 9.7,42.291 11.424,40.567 16.911,40.567 17.145,40.333 17.145,36.124 U5.8
  Top Layer w0.5: C2.2 5.639,43.041 6.389,42.291 Y1.2
pads on no net: P2.4 U1.8 U1.9 U1.10 U1.14 U2.8 U2.9 U2.10 U2.14 U5.2 U5.3 U5.6 U5.10 U5.11 U5.19 U5.22 U5.25 U6.7 U7.8
copper on no net:
  other v3: 52.629,9.322 52.629,62.89

## Polygon pours and split planes (outlines as drawn)
Vso on Top Layer "VSO_L01_P013" (solid, remove dead copper, pour order 13): 44.45,40.843 44.45,33.63 36.881,33.63 36.881,6.071 29.337,6.071 29.337,40.843
3V3 on Top Layer "3V3_L01_P017" (solid, remove dead copper, pour order 17): 45.466,47.752 45.466,65.151 21.133,65.151 21.133,47.752
GND on Top Layer "GND_L01_P007" (solid, remove dead copper, pour order 7): 21.272,44.704 21.272,35.56 29.337,35.56 29.337,43.917 42.545,43.917 42.545,48.006 42.481,48.006 42.481,55.499 21.273,55.499
Vin on Top Layer "VIN_L01_P002" (solid, remove dead copper, pour order 2): 34.95,43.815 58.293,43.815 58.293,37.567 39.599,37.567 39.599,40.843 34.95,40.843
GND on Top Layer "GND_L01_P037" (solid, remove dead copper, pour order 37): 10.996,22.248 9.906,21.158 9.906,17.891 17.79,17.891 17.79,22.197
S2H on Top Layer "S2H_L01_P008" (solid, remove dead copper, pour order 8): 37.033,33.401 37.033,25.012 50.597,25.012 50.597,33.401
S1H on Top Layer "S1H_L01_P010" (solid, remove dead copper, pour order 10): 50.546,18.669 50.546,21.082 57.912,21.082 57.912,6.147 36.982,6.147 36.982,18.669
12V on Top Layer "12V_L01_P023" (solid, remove dead copper, pour order 23): 5.08,66.04 3.175,64.135 3.175,61.214 10.363,61.214 10.363,48.59 20.98,48.59 20.98,51.13 16.637,51.13 15.913,51.854 15.748,64.262 13.97,66.04
DGND on Top Layer "DGND_L01_P026" (solid, remove dead copper, pour order 26): 3.175,58.953 3.175,48.184 10.287,48.184 10.287,58.953
GND on Top Layer "GND_L01_P004" (solid, remove dead copper, pour order 4): 49.225,18.307 51.257,18.307 51.257,21.387 49.225,21.387 49.225,24.53 37.389,24.53 37.389,22.581 33.96,22.581 33.96,17.958 37.389,17.958 37.389,15.418 49.225,15.418
GND on Top Layer "GND_L01_P025" (solid, remove dead copper, pour order 25): 44.602,37.973 44.602,33.401 51.816,33.401 52.959,32.258 58.344,32.258 58.344,37.973
GND on Top Layer "GND_L01_P028" (solid, remove dead copper, pour order 28): 48.768,49.403 48.768,43.942 58.293,43.942 58.293,49.403
S2H on Top Layer "S2H_L01_P016" (solid, remove dead copper, pour order 16): 49.225,33.401 49.225,21.59 57.963,21.59 57.963,25.273 57.963,33.401
VinFILT on Top Layer "VINFILT_L01_P022" (solid, remove dead copper, pour order 22): 45.339,57.15 46.863,58.674 57.15,58.674 58.42,57.404 58.42,49.53 48.514,49.53 48.514,44.069 45.339,44.069
no net on Top Layer "NONET_L01_P024" (solid, remove dead copper, pour order 24): 110.49,79.756 110.49,69.723
GND on Bottom Layer "GND_L02_P038" (solid, remove dead copper, pour order 38): 59.563,69.469 48.031,69.469 48.031,37.541 29.82,37.541 29.82,5.994 59.563,5.994
GND on Bottom Layer "GND_L02_P035" (solid, remove dead copper, pour order 35): 20.345,33.426 20.345,13.233 32.131,13.233 32.131,33.426
GND on Bottom Layer "GND_L02_P039" (solid, pour order 39): 20.015,33.172 22.149,33.172 22.149,38.049 48.311,38.049 48.311,69.977 0,69.977 0,1.092 20.015,1.092
Vin on Bottom Layer "VIN_L02_P030" (solid, pour order 30): 46.025,40.818 39.599,40.818 39.599,37.592 45.992,37.592
no net on Bottom Layer "NONET_L02_P040" (solid, pour order 40): 39.497,40.843 39.446,40.843 39.446,35.941
Vso on Bottom Layer "VSO_L02_P031" (solid, pour order 31): 39.497,40.843 31.394,40.843 31.394,35.941 39.446,35.941
DGND on Bottom Layer "DGND_L02_P032" (solid, pour order 32): 2.21,48.525 2.21,63.144 24.282,63.144 24.282,57.785 10.236,57.785 10.236,48.552

## Keep-outs
Keep-Out Layer:
  the board outline again, w0.254

## Silkscreen, mask and mechanical layers (free items; w line width, h text height)
Top Overlay:
  text "UoA ECSE 2020 / Summer Workshop / MotorDriver V1.0" at 40.538,1.6 h1
  text "GND RST" at 19.38,1.422 h0.76 r90
  text "MOSI SCK" at 20.523,1.422 h0.76 r90
  text "3V3 MISO" at 21.666,1.422 h0.76 r90
Top Solder:
  text "UoA ECSE 2020 / Summer Workshop / MotorDriver V1.0" at 40.538,1.6 h1

## Text inside footprints (layer, text, board x,y; h text height)
P3: Top Overlay "6" at 14.732,6.731 h1.27; Top Overlay "5" at 14.732,4.191 h1.27; Top Overlay "1" at 6.096,4.191 h1.27